# EAGLE board Procesor-Atmega328 (EAGLE 9.4.0)
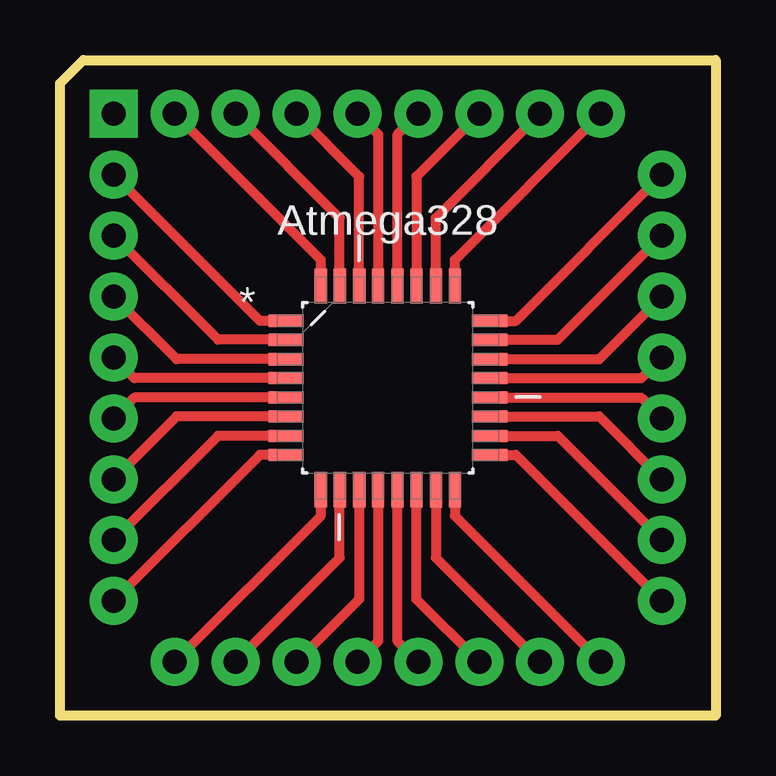
[diagram p0: board, top side]
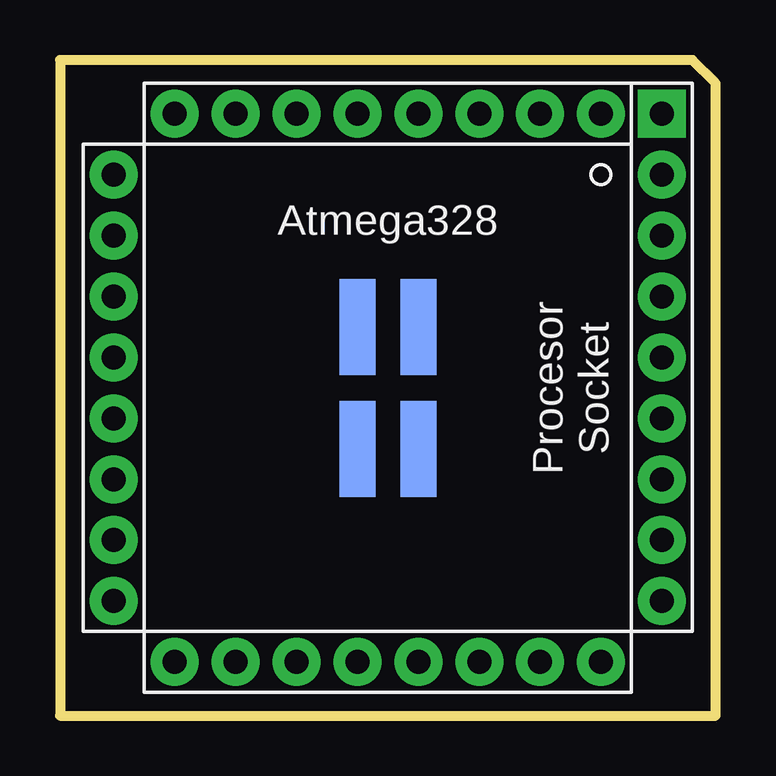
[diagram p1: board, bottom side, seen from below]

Size 27.34 x 27.34 mm. Coordinates in mm from the lower left corner, seen from the top.
Outline: 0,0 0,26.37 0.97,27.34 27.34,27.34 27.34,0 0,0
Copper layers (1*16): Top 0.035mm / dielectric 1.5mm / Bottom 0.035mm
Design rules "default *": minimum track width 10mil, minimum drill 24mil, track to track 8mil, track to pad 8mil, pad to pad 8mil, via to via 8mil, smd to smd 8mil, copper to edge 10mil, drill to drill 8mil, minimum pad ring 10mil, minimum via ring 8mil, stop-mask expansion 4mil, vias tented up to drill 0mil, thermal gap 10mil

## Footprints (pad centres in the part's own frame; a part is rotated, then mirrored left to right if it is on the bottom)
QFP80P900X900X120-32N = smd 1.473 x 0.508: 1 -4.242,2.794; 2 -4.242,2.007; 3 -4.242,1.194; 4 -4.242,0.406; 5 -4.242,-0.406; 6 -4.242,-1.194; 7 -4.242,-2.007; 8 -4.242,-2.794; 17 4.242,-2.794; 18 4.242,-2.007; 19 4.242,-1.194; 20 4.242,-0.406; 21 4.242,0.406; 22 4.242,1.194; 23 4.242,2.007; 24 4.242,2.794 | smd 0.508 x 1.473: 9 -2.794,-4.242; 10 -2.007,-4.242; 11 -1.194,-4.242; 12 -0.406,-4.242; 13 0.406,-4.242; 14 1.194,-4.242; 15 2.007,-4.242; 16 2.794,-4.242; 25 2.794,4.242; 26 2.007,4.242; 27 1.194,4.242; 28 0.406,4.242; 29 -0.406,4.242; 30 -1.194,4.242; 31 -2.007,4.242; 32 -2.794,4.242
PROCESSOR-SOCKET_PCB = smd 4 x 1.5: 32 2.54,1.27; 36 -2.54,1.27; D+ 2.54,-1.27; D- -2.54,-1.27 | drill 1 pad 2: A0 11.43,6.35; A1 11.43,8.89; A2 8.89,11.43; A3 6.35,11.43; A4 3.81,11.43; A5 1.27,11.43; A6 11.43,-3.81; A7 11.43,3.81; AREF 11.43,-1.27; CRYST1 -11.43,-6.35; CRYST2 -11.43,-8.89; D0 -3.81,11.43; D1 -6.35,11.43; D2 -8.89,11.43; D3 -11.43,8.89; D4 -11.43,6.35; D5 -8.89,-11.43; D6 -6.35,-11.43; D7 -3.81,-11.43; D8 -1.27,-11.43; D9 1.27,-11.43; D10 3.81,-11.43; D11 6.35,-11.43; D12 8.89,-11.43; D13 11.43,-8.89; GND -11.43,3.81; GND2 -11.43,-1.27; GND3 11.43,1.27; RESET -1.27,11.43; VCC -11.43,1.27; VCC2 -11.43,-3.81; VCC3 11.43,-6.35 | drill 1 pad 2 square: P$1 -11.43,11.43

## Placement (x,y rotation side)
ATMEGA8  [QFP80P900X900X120-32N]  13.67,13.67 0 top
E$2  [PROCESSOR-SOCKET_PCB]  13.67,13.67 270 bottom

## Library data of the parts
ATMEGA8 = atmega328smd
E$2 = Cing Library

## Nets
S$1: ATMEGA8.1 E$2.D2
S$2: ATMEGA8.2 E$2.D1
S$3: ATMEGA8.3 E$2.D0
S$4: ATMEGA8.4 E$2.RESET
S$5: ATMEGA8.5 E$2.A5
S$6: ATMEGA8.6 E$2.A4
S$7: ATMEGA8.7 E$2.A3
S$8: ATMEGA8.8 E$2.A2
S$9: ATMEGA8.9 E$2.A1
S$10: ATMEGA8.10 E$2.A0
S$11: ATMEGA8.11 E$2.A7
S$12: ATMEGA8.12 E$2.GND3
S$13: ATMEGA8.13 E$2.AREF
S$14: ATMEGA8.14 E$2.A6
S$15: ATMEGA8.15 E$2.VCC3
S$16: ATMEGA8.16 E$2.D13
S$17: ATMEGA8.17 E$2.D12
S$18: ATMEGA8.18 E$2.D11
S$19: ATMEGA8.19 E$2.D10
S$20: ATMEGA8.20 E$2.D9
S$21: ATMEGA8.21 E$2.D8
S$22: ATMEGA8.22 E$2.D7
S$23: ATMEGA8.23 E$2.D6
S$24: ATMEGA8.24 E$2.D5
S$25: ATMEGA8.25 E$2.CRYST2
S$26: ATMEGA8.26 E$2.CRYST1
S$27: ATMEGA8.27 E$2.VCC2
S$28: ATMEGA8.28 E$2.GND2
S$29: ATMEGA8.29 E$2.VCC
S$30: ATMEGA8.30 E$2.GND
S$31: ATMEGA8.31 E$2.D4
S$32: ATMEGA8.32 E$2.D3

## Tracks (layer width: path | path; a pad name or v marks a point on that pad's centre or on a via)
S$1
  Top 0.406: ATMEGA8.1 8.34,16.46 E$2.D2
S$2
  Top 0.406: ATMEGA8.2 6.58,15.68 E$2.D1
S$3
  Top 0.406: ATMEGA8.3 4.86,14.86 E$2.D0
S$4
  Top 0.406: ATMEGA8.4 3.1,14.08 E$2.RESET
S$5
  Top 0.406: ATMEGA8.5 3.1,13.26 E$2.A5
S$6
  Top 0.406: ATMEGA8.6 4.86,12.48 E$2.A4
S$7
  Top 0.406: ATMEGA8.7 6.58,11.66 E$2.A3
S$8
  Top 0.406: ATMEGA8.8 8.34,10.88 E$2.A2
S$9
  Top 0.406: ATMEGA8.9 10.88,8.34 E$2.A1
S$10
  Top 0.406: ATMEGA8.10 11.66,6.58 E$2.A0
S$11
  Top 0.406: ATMEGA8.11 12.48,4.86 E$2.A7
S$12
  Top 0.406: ATMEGA8.12 13.26,3.1 E$2.GND3
S$13
  Top 0.406: E$2.AREF 14.08,3.1 ATMEGA8.13
S$14
  Top 0.406: ATMEGA8.14 14.86,4.86 E$2.A6
S$15
  Top 0.406: ATMEGA8.15 15.68,6.58 E$2.VCC3
S$16
  Top 0.406: ATMEGA8.16 16.46,8.34 E$2.D13
S$17
  Top 0.406: ATMEGA8.17 19,10.88 E$2.D12
S$18
  Top 0.406: ATMEGA8.18 20.76,11.66 E$2.D11
S$19
  Top 0.406: ATMEGA8.19 22.48,12.48 E$2.D10
S$20
  Top 0.406: ATMEGA8.20 24.24,13.26 E$2.D9
S$21
  Top 0.406: ATMEGA8.21 24.24,14.08 E$2.D8
S$22
  Top 0.406: ATMEGA8.22 22.48,14.86 E$2.D7
S$23
  Top 0.406: ATMEGA8.23 20.76,15.68 E$2.D6
S$24
  Top 0.406: ATMEGA8.24 19,16.46 E$2.D5
S$25
  Top 0.406: ATMEGA8.25 16.46,19 E$2.CRYST2
S$26
  Top 0.406: ATMEGA8.26 15.68,20.76 E$2.CRYST1
S$27
  Top 0.406: ATMEGA8.27 14.86,22.48 E$2.VCC2
S$28
  Top 0.406: ATMEGA8.28 14.08,24.24 E$2.GND2
S$29
  Top 0.406: E$2.VCC 13.26,24.24 ATMEGA8.29
S$30
  Top 0.406: ATMEGA8.30 12.48,22.48 E$2.GND
S$31
  Top 0.406: ATMEGA8.31 11.66,20.76 E$2.D4
S$32
  Top 0.406: ATMEGA8.32 10.88,19 E$2.D3

## Text on the board
tPlace: Atmega328
bPlace: Atmega328